# EAGLE board CP2102 breakout (EAGLE 9.5.2)
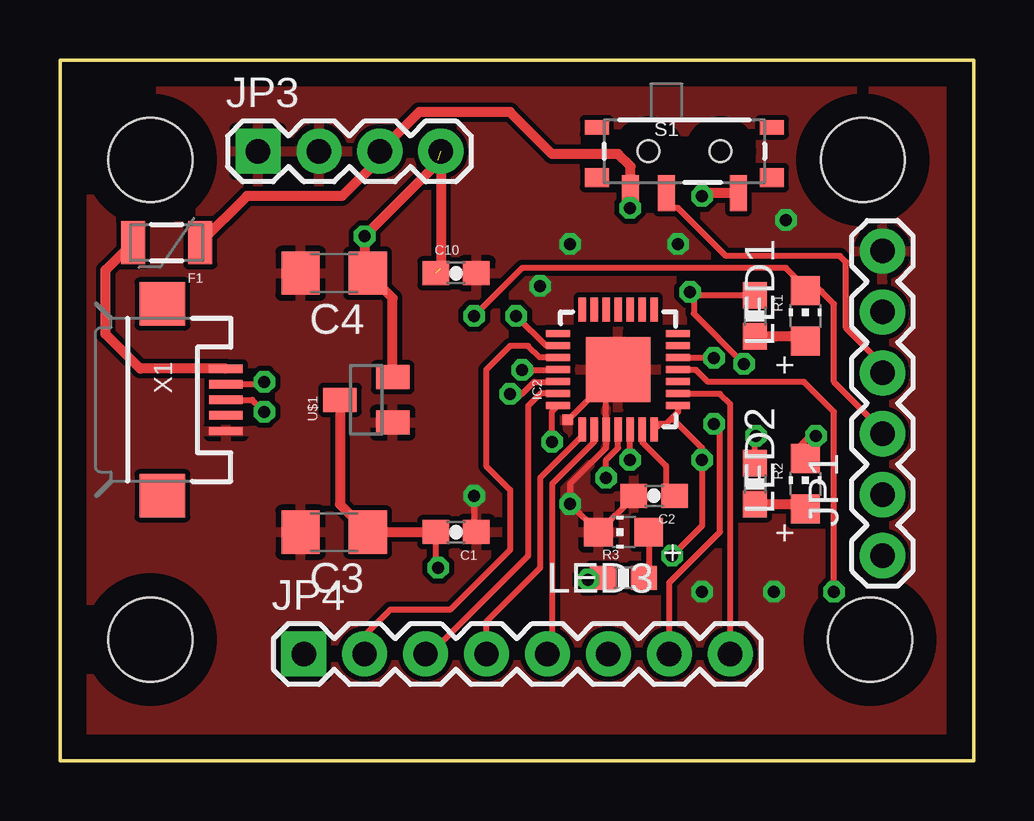
[diagram p0: board, top side]
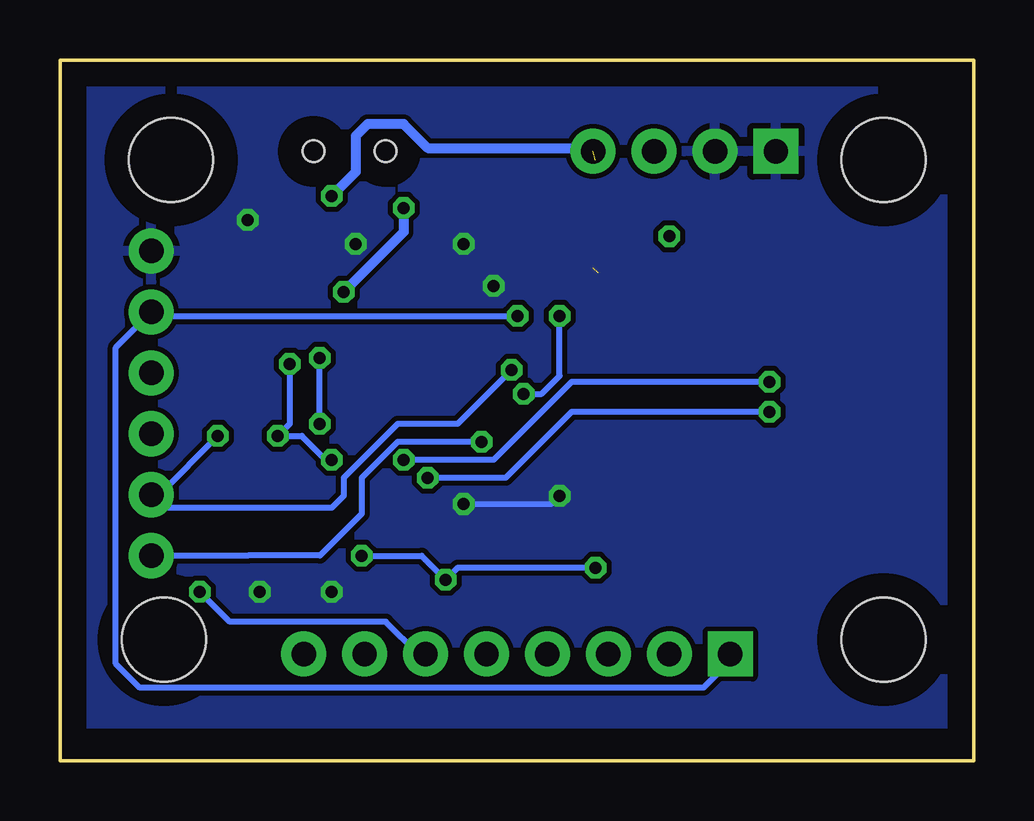
[diagram p1: board, bottom side, seen from below]

Size 38.1 x 29.21 mm. Coordinates in mm from the lower left corner, seen from the top.
Outline: 0,29.21 38.1,29.21 38.1,0 0,0 0,29.21
Copper layers (1*16): Top 0.035mm / dielectric 1.5mm / Bottom 0.035mm
Design rules "default *": minimum track width 10mil, minimum drill 24mil, track to track 8mil, track to pad 8mil, pad to pad 8mil, via to via 8mil, smd to smd 8mil, copper to edge 40mil, drill to drill 8mil, minimum pad ring 10mil, minimum via ring 8mil, stop-mask expansion 4mil, vias tented up to drill 5mm, thermal gap 10mil
Holes 3.5 mm at 3.77,5.04 33.47,25.04 33.77,5.04 3.77,25.04

## Footprints (pad centres in the part's own frame; a part is rotated, then mirrored left to right if it is on the bottom)
0603-CAP = smd 1.1 x 1: 1 -0.85,0; 2 0.85,0
C3216 = smd 1.6 x 1.8: 1 -1.4,0; 2 1.4,0
PTC-1206 = smd 1 x 1.8: 1 -1.4,0; 2 1.4,0
MLP28 = smd 1 x 0.3: 1 -2.5,1.5; 2 -2.5,1; 3 -2.5,0.5; 4 -2.5,0; 5 -2.5,-0.5; 6 -2.5,-1; 7 -2.5,-1.5; 15 2.5,-1.5; 16 2.5,-1; 17 2.5,-0.5; 18 2.5,0; 19 2.5,0.5; 20 2.5,1; 21 2.5,1.5 | smd 0.3 x 1: 8 -1.5,-2.5; 9 -1,-2.5; 10 -0.5,-2.5; 11 0,-2.5; 12 0.5,-2.5; 13 1,-2.5; 14 1.5,-2.5; 22 1.5,2.5; 23 1,2.5; 24 0.5,2.5; 25 0,2.5; 26 -0.5,2.5; 27 -1,2.5; 28 -1.5,2.5 | smd 2.7 x 2.7: EXP 0,0 | smd 0.435 x 0.435: M -2.103,2.103
FTDI_BASIC = drill 1.016 pad 1.88: CTS 10.16,0; DTR 0,0; GND 12.7,0; RXI 2.54,0; TXO 5.08,0; VCC 7.62,0
1X04 = drill 1.016 pad 1.88 square: 1 0,0 | drill 1.016 pad 1.88: 2 2.54,0; 3 5.08,0; 4 7.62,0
1X08 = drill 1.016 pad 1.88 square: 1 0,0 | drill 1.016 pad 1.88: 2 2.54,0; 3 5.08,0; 4 7.62,0; 5 10.16,0; 6 12.7,0; 7 15.24,0; 8 17.78,0
CHIP-LED0805 = smd 1.2 x 1.2: A 0,-1.05; C 0,1.05
0603-RES = smd 1.1 x 1: 1 -0.85,0; 2 0.85,0
SWITCH-SPST-SMD-A = smd 0.7 x 1.5: 1 -2.25,-1.75; 2 -0.75,-1.75; 3 2.25,-1.75 | smd 1 x 0.6: GND1 -3.65,1; GND3 3.65,1 | smd 1 x 0.8: GND2 -3.65,-1.1; GND4 3.65,-1.1 | hole 0.9: -1.5,0; 1.5,0
662K = smd 1 x 1.4: GND -0.95,-1.1; IN 0,1.1; OUT 0.95,-1.1
USB-MICROB = smd 0.35 x 1.4: D+ 0,2.65; D- -0.65,2.65; GND 1.3,2.65; ID 0.65,2.65; VBUS -1.3,2.65 | smd 1.8 x 1.9: MT1 -4,0; MT2 4,0

## Placement (x,y rotation side)
C1  100nF  [0603-CAP]  16.51,9.53 180 top
C2  100nF  [0603-CAP]  24.77,11.04 180 top
C3  10uF  [C3216]  11.43,9.53 180 top
C4  22uF  [C3216]  11.43,20.32 180 top
C10  100nF  [0603-CAP]  16.51,20.32 0 top
F1  PTCSMD  [PTC-1206]  4.45,21.59 180 top
IC2  CP210X_USB_UART  [MLP28]  23.27,16.31 90 top
JP1  FTDI_BASICPTH  [FTDI_BASIC]  34.29,8.54 90 top
JP3  [1X04]  8.26,25.4 0 top
JP4  [1X08]  10.16,4.45 0 top
LED1  bijela  [CHIP-LED0805]  31.07,18.54 0 top
LED2  crvena  [CHIP-LED0805]  31.07,11.54 0 top
LED3  plava  [CHIP-LED0805]  23.5,9.53 90 top
R1  680  [0603-RES]  28.97,18.54 270 top
R2  680  [0603-RES]  28.97,11.54 270 top
R3  680  [0603-RES]  23.5,7.62 0 top
S1  [SWITCH-SPST-SMD-A]  26.04,25.4 0 top
U$1  622K  [662K]  12.77,15.04 90 top
U$2  [OSH3MM]  8.77,16.04 0 top
U$3  [NOVI_LOGO-4MM]  17.52,21.79 0 top
U$4  [LUDI_LOGO_BACK]  6.27,10.54 0 top
U$5  [E-RADIONICA.COM_MADE_IN_BACK!]  6.02,8.04 0 top
X1  USB-MICROB  [USB-MICROB]  4.27,15.04 270 top

## Library data of the parts
C1 C2 C10 F1 JP1 JP3 JP4 R1-R3 S1 U$1 X1 = SparkFun
C3 C4 = rcl
IC2 = SparkFun-DigitalIC
LED1-LED3 = adafruit
U$2-U$5 = ERADIONICA

## Nets
3.3V: C4.1 C10.1 JP3.4 S1.3 U$1.OUT
+5V: C1.2 C3.1 F1.1 IC2.7 IC2.8 JP3.3 R1.1 R2.1 R3.1 S1.1 U$1.IN
CTS: IC2.23 JP1.CTS JP4.1
D+: IC2.4 X1.D+
D-: IC2.5 X1.D-
DCD: IC2.1 JP4.4
DSR: IC2.27 JP4.3
DTR: IC2.28 JP1.DTR
GND: C1.1 C2.2 C3.2 C4.2 C10.2 IC2.3 IC2.EXP IC2.M JP1.GND JP3.1 JP3.2 LED3.C U$1.GND X1.GND
N$1: LED1.A R1.2
N$2: LED2.A R2.2
N$3: LED3.A R3.2
N$4: C2.1 IC2.6
RI: IC2.2 JP4.5
RST: IC2.9 JP4.8
RTS: IC2.24 JP4.2
RXD: IC2.25 JP1.RXI LED2.C
SUSPEND: IC2.12 JP4.7
SUSPEND': IC2.11 JP4.6
TXD: IC2.26 JP1.TXO LED1.C
VBUS: F1.2 X1.VBUS
VCC: JP1.VCC S1.2

## Tracks (layer width: path | path; a pad name or v marks a point on that pad's centre or on a via)
3.3V  (via drill 0.5)  (2 unrouted)
  Top 0.406: JP3.4 15.88,20.54 | S1.3 26.88,23.65 v26.77,23.54 | U$1.OUT 13.87,19.28 C4.1 12.7,20.45 v12.7,21.86 15.77,24.93 15.77,25.04
  Bottom 0.406: JP3.4 16.02,25.54 22.77,25.54 23.77,26.54 25.27,26.54 25.77,26.04 25.77,24.54 v26.77,23.54
+5V  (via drill 0.5)
  Top 0.254: IC2.8 25.77,14.54 25.52,14.29 | 25.52,14.29 25.27,14.04 25,14.04 IC2.7 | C1.2 15.66,8.15 v15.77,8.04 | v22.02,7.54 22.57,7.54 R3.1 | R2.1 28.97,13.49 v29.02,13.54 | 25.52,14.29 26.77,13.04 v26.77,12.54 26.77,9.79 v25.52,8.54 | R1.1 26.42,19.39 | 26.42,19.39 v26.27,19.54 | v23.77,23.04 23.77,23.63 S1.1 | 26.42,19.39 26.42,18.64 v28.52,16.54
  Top 0.406: F1.1 7.79,23.54 11.77,23.54 13.33,25.11 JP3.3 14.97,27.04 18.77,27.04 20.52,25.29 23.27,25.29 23.79,24.77 S1.1 | C1.2 C3.1 11.67,10.68 U$1.IN
  Bottom 0.254: v26.77,12.54 27.02,12.54 28.02,13.54 v29.02,13.54 28.52,14.04 v28.52,16.54 | v15.77,8.04 21.52,8.04 v22.02,7.54 23.02,8.54 v25.52,8.54
  Bottom 0.406: v23.77,23.04 23.77,22.04 v26.27,19.54
CTS  (via drill 0.5)
  Top 0.254: 20.75,17.29 IC2.23 20.25,17.31 v19.02,18.54
  Bottom 0.254: v19.02,18.54 33.52,18.54 33.69,18.7 JP1.CTS 35.77,17.23 35.77,4.04 34.77,3.04 11.27,3.04 10.16,4.15 JP4.1
D+  (via drill 0.5)
  Top 0.254: X1.D+ 8.02,15.04 v8.52,14.54 | v22.77,11.79 22.77,12.54 23.27,13.04 IC2.4
  Bottom 0.254: v8.52,14.54 16.77,14.54 19.52,11.79 v22.77,11.79
D-  (via drill 0.5)
  Top 0.254: X1.D- 8.42,15.69 v8.52,15.79 | v23.77,12.54 IC2.5
  Bottom 0.254: v8.52,15.79 16.77,15.79 20.02,12.54 v23.77,12.54
DCD
  Top 0.254: IC2.1 21.77,13.54 20.02,11.79 20.02,8.04 17.77,5.79 JP4.4
DSR
  Top 0.254: IC2.27 20.04,15.31 19.52,14.79 19.52,8.54 15.77,4.79 15.58,4.79 JP4.3
DTR  (via drill 0.5)
  Top 0.254: 20.75,14.79 IC2.28 20.52,14.56 v20.52,13.29
  Bottom 0.254: v20.52,13.29 24.02,13.29 25.52,11.79 25.52,10.29 27.27,8.54 30.27,8.54 | 30.26,8.54 30.27,8.54 | JP1.DTR 30.27,8.54
GND  (via drill 0.5)
  Top 0.254: IC2.EXP 23.27,15.29 | IC2.M IC2.EXP | v17.27,11.04 17.27,9.62 C1.1 | IC2.EXP 22.77,15.81 IC2.3 22.77,13.04 21.27,11.54 v21.27,10.7 LED3.C 23.92,11 C2.2
  Bottom 0.254: v21.27,10.7 17.61,10.7 v17.27,11.04
  other vias: 29.77,7.04 26.77,7.04 30.27,22.54 20.02,19.79 25.77,21.54 21.27,21.54
  pour Top: 0.27,1.04 36.77,1.04 36.77,28.54 0.27,28.54
  pour Bottom: 0.77,1.54 37.27,1.54 37.27,28.54 0.77,28.54
N$1
  Top 0.406: R1.2 30.87,17.69 LED1.A
N$2
  Top 0.406: R2.2 30.87,10.69 LED2.A
N$3
  Top 0.254: LED3.A 24.54,7.82 R3.2
N$4
  Top 0.254: IC2.6 24.27,13.29 25.27,12.29 25.27,11.39 C2.1
RI
  Top 0.254: IC2.2 22.27,13.29 20.52,11.54 20.52,4.64 JP4.5
RST
  Top 0.254: JP4.8 27.94,14.87 27.52,15.29 25.79,15.29 IC2.9
RTS
  Top 0.254: IC2.24 20,16.81 19.52,17.29 18.77,17.29 17.77,16.29 17.77,12.29 18.77,11.29 18.77,8.79 16.27,6.29 13.77,6.29 12.52,5.04 12.52,4.62 JP4.2
RXD  (via drill 0.5)
  Top 0.254: v19.27,16.29 20.75,16.29 IC2.25 | v31.52,13.54 31.27,13.54 30.77,13.04 30.77,12.89 LED2.C
  Bottom 0.254: v31.52,13.54 33.98,11.09 JP1.RXI 33.75,10.54 26.77,10.54 26.27,11.04 26.27,11.79 24.02,14.04 21.52,14.04 v19.27,16.29
SUSPEND  (via drill 0.5)
  Top 0.254: JP4.7 25.4,7.42 27.52,9.54 27.52,13.79 v27.27,14.04 | v27.27,16.79 25.79,16.79 IC2.12
  Bottom 0.254: v27.27,14.04 v27.27,16.79
SUSPEND'  (via drill 0.5)
  Top 0.254: v32.27,7.04 32.27,14.54 31.02,15.79 27.02,15.79 26.52,16.29 25.79,16.29 IC2.11
  Bottom 0.254: JP4.6 23.18,4.45 24.52,5.79 31.02,5.79 v32.27,7.04
TXD  (via drill 0.5)
  Top 0.254: JP1.TXO 34.29,13.77 32.27,15.79 32.27,19.04 31.77,19.54 | 31.77,19.54 31.12,19.54 LED1.C 31.72,19.59 | 31.72,19.59 31.77,19.54 | 31.72,19.59 31.27,20.04 30.77,20.04 30.27,20.54 19.27,20.54 v17.27,18.54 | v18.77,15.29 19.27,15.29 19.77,15.79 20.75,15.79 IC2.26
  Bottom 0.254: v18.77,15.29 18.02,15.29 17.27,16.04 v17.27,18.54
VBUS
  Top 0.406: X1.VBUS 3.35,16.34 1.91,17.78 1.91,20.45 F1.2
VCC
  Top 0.254: JP1.VCC 34.29,16.52 32.77,18.04 32.77,20.79 32.52,21.04 27.77,21.04 25.77,23.04 25.27,23.04 25.27,23.63 S1.2

## Text on the board
200bmp: 5V | 3V3 | GND | TX | CTS | VCC | TX | RX | RX | DTR
208bmp: output voltage switch | GND | GND | 5V | 3V3 | 5V | 3.3V | GND | CTS | VCC | TX | CP2102 USB / to UART bridge | RX | DTR | CTS | RTS | DSR | DCD | RI | SUSPEND | RST | SUSPEND'